# Altium PCB Greinke_Boost_Converter_Electromagnet.PcbDoc
Units mm, origin at the board's own origin, x right, y up, seen from the top; angles counter-clockwise.
Board outline 82.04 x 80.9 mm, 2 copper layers (Top Layer, Bottom Layer); 19 components, 29 nets, 62 pads, 8 vias.
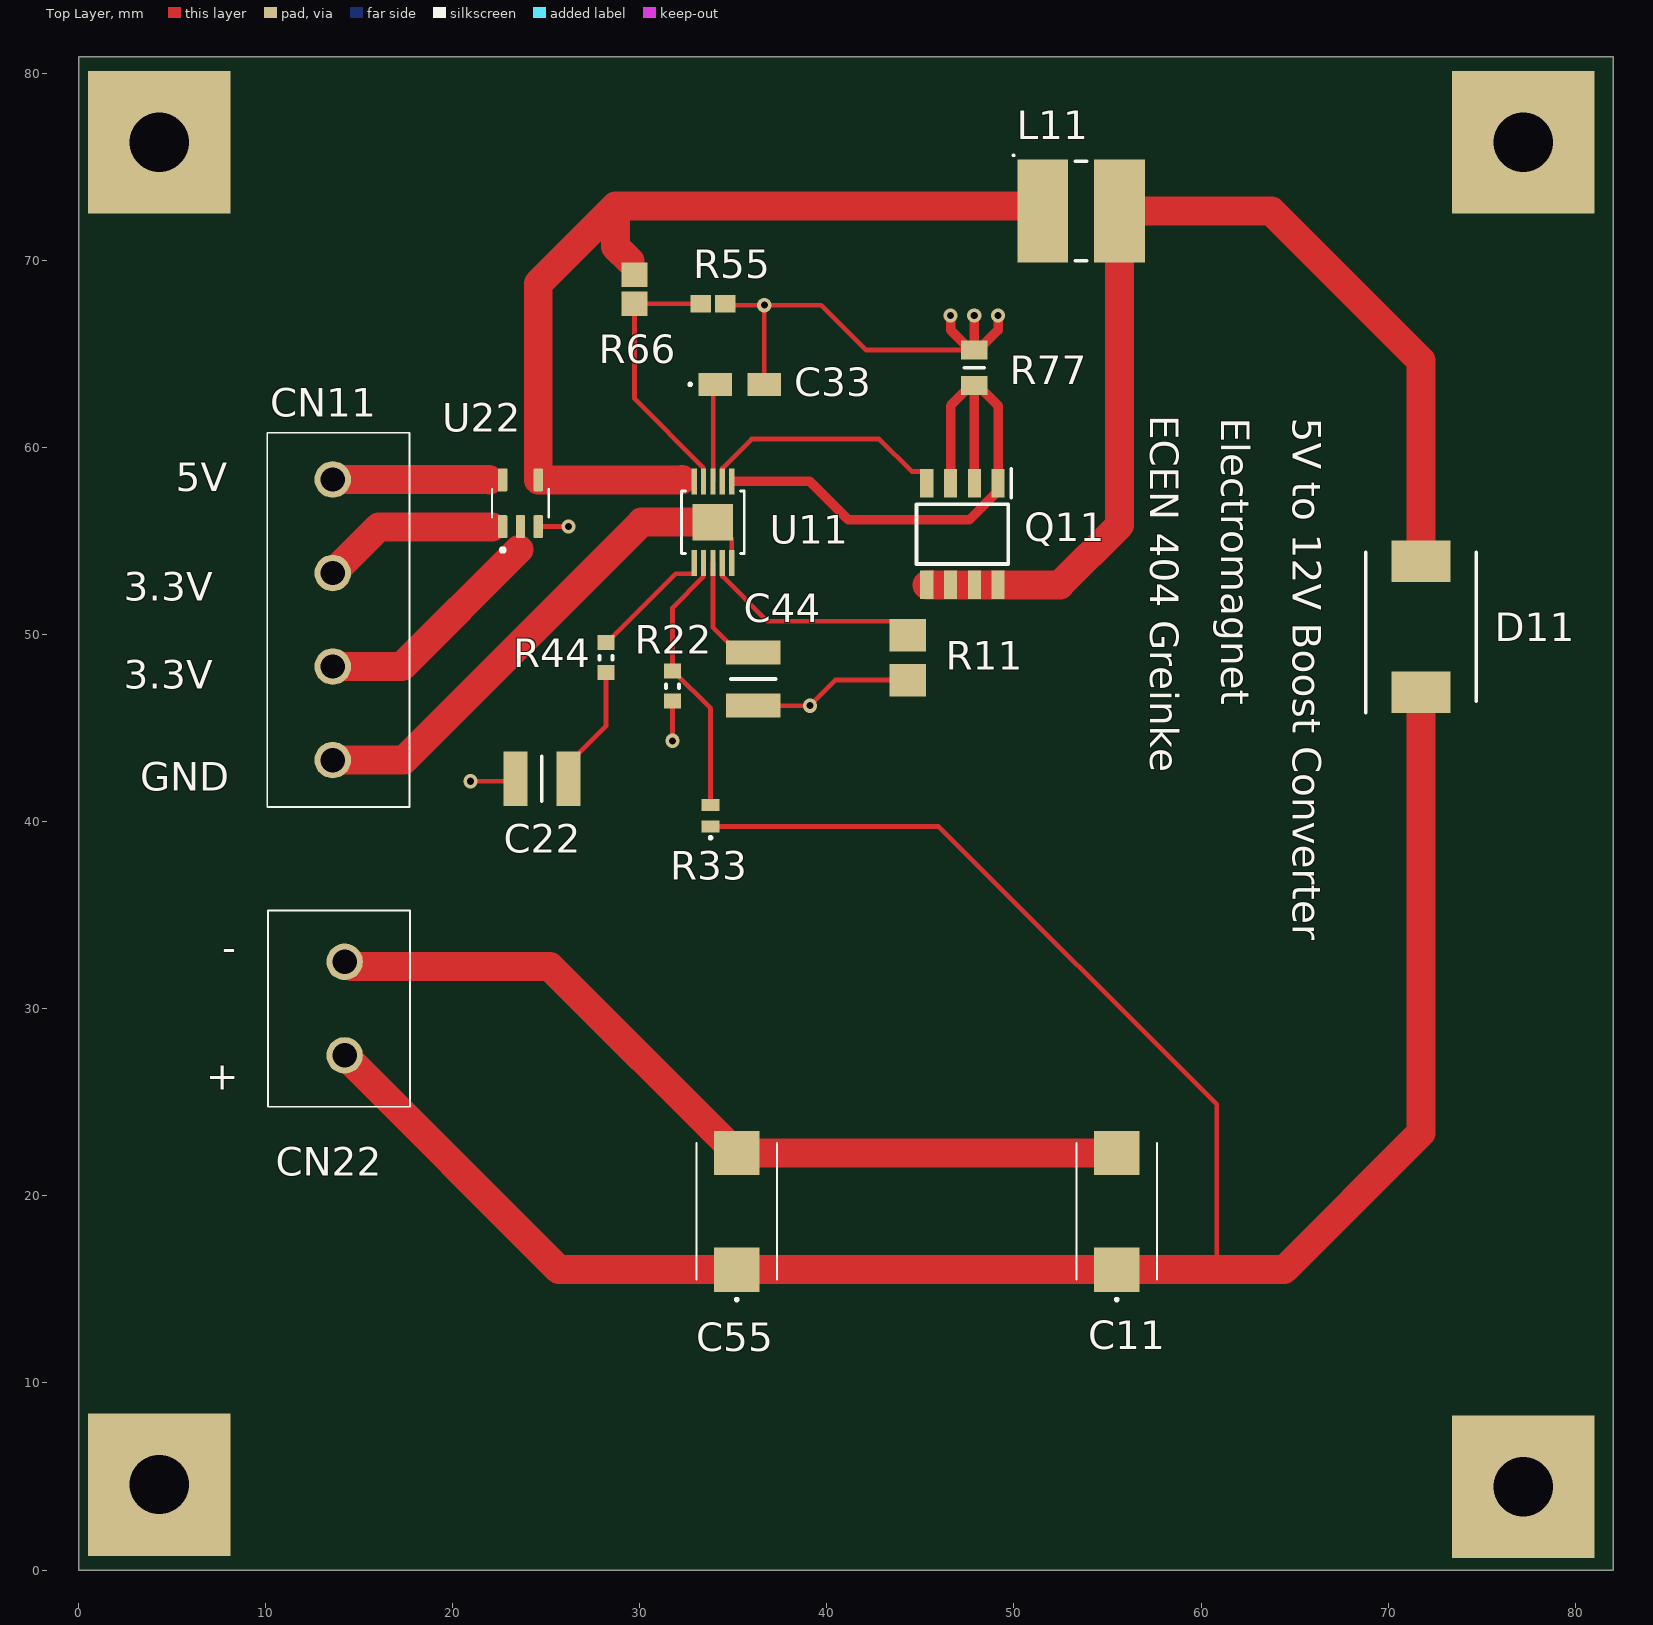
[diagram p0: Top Layer view]
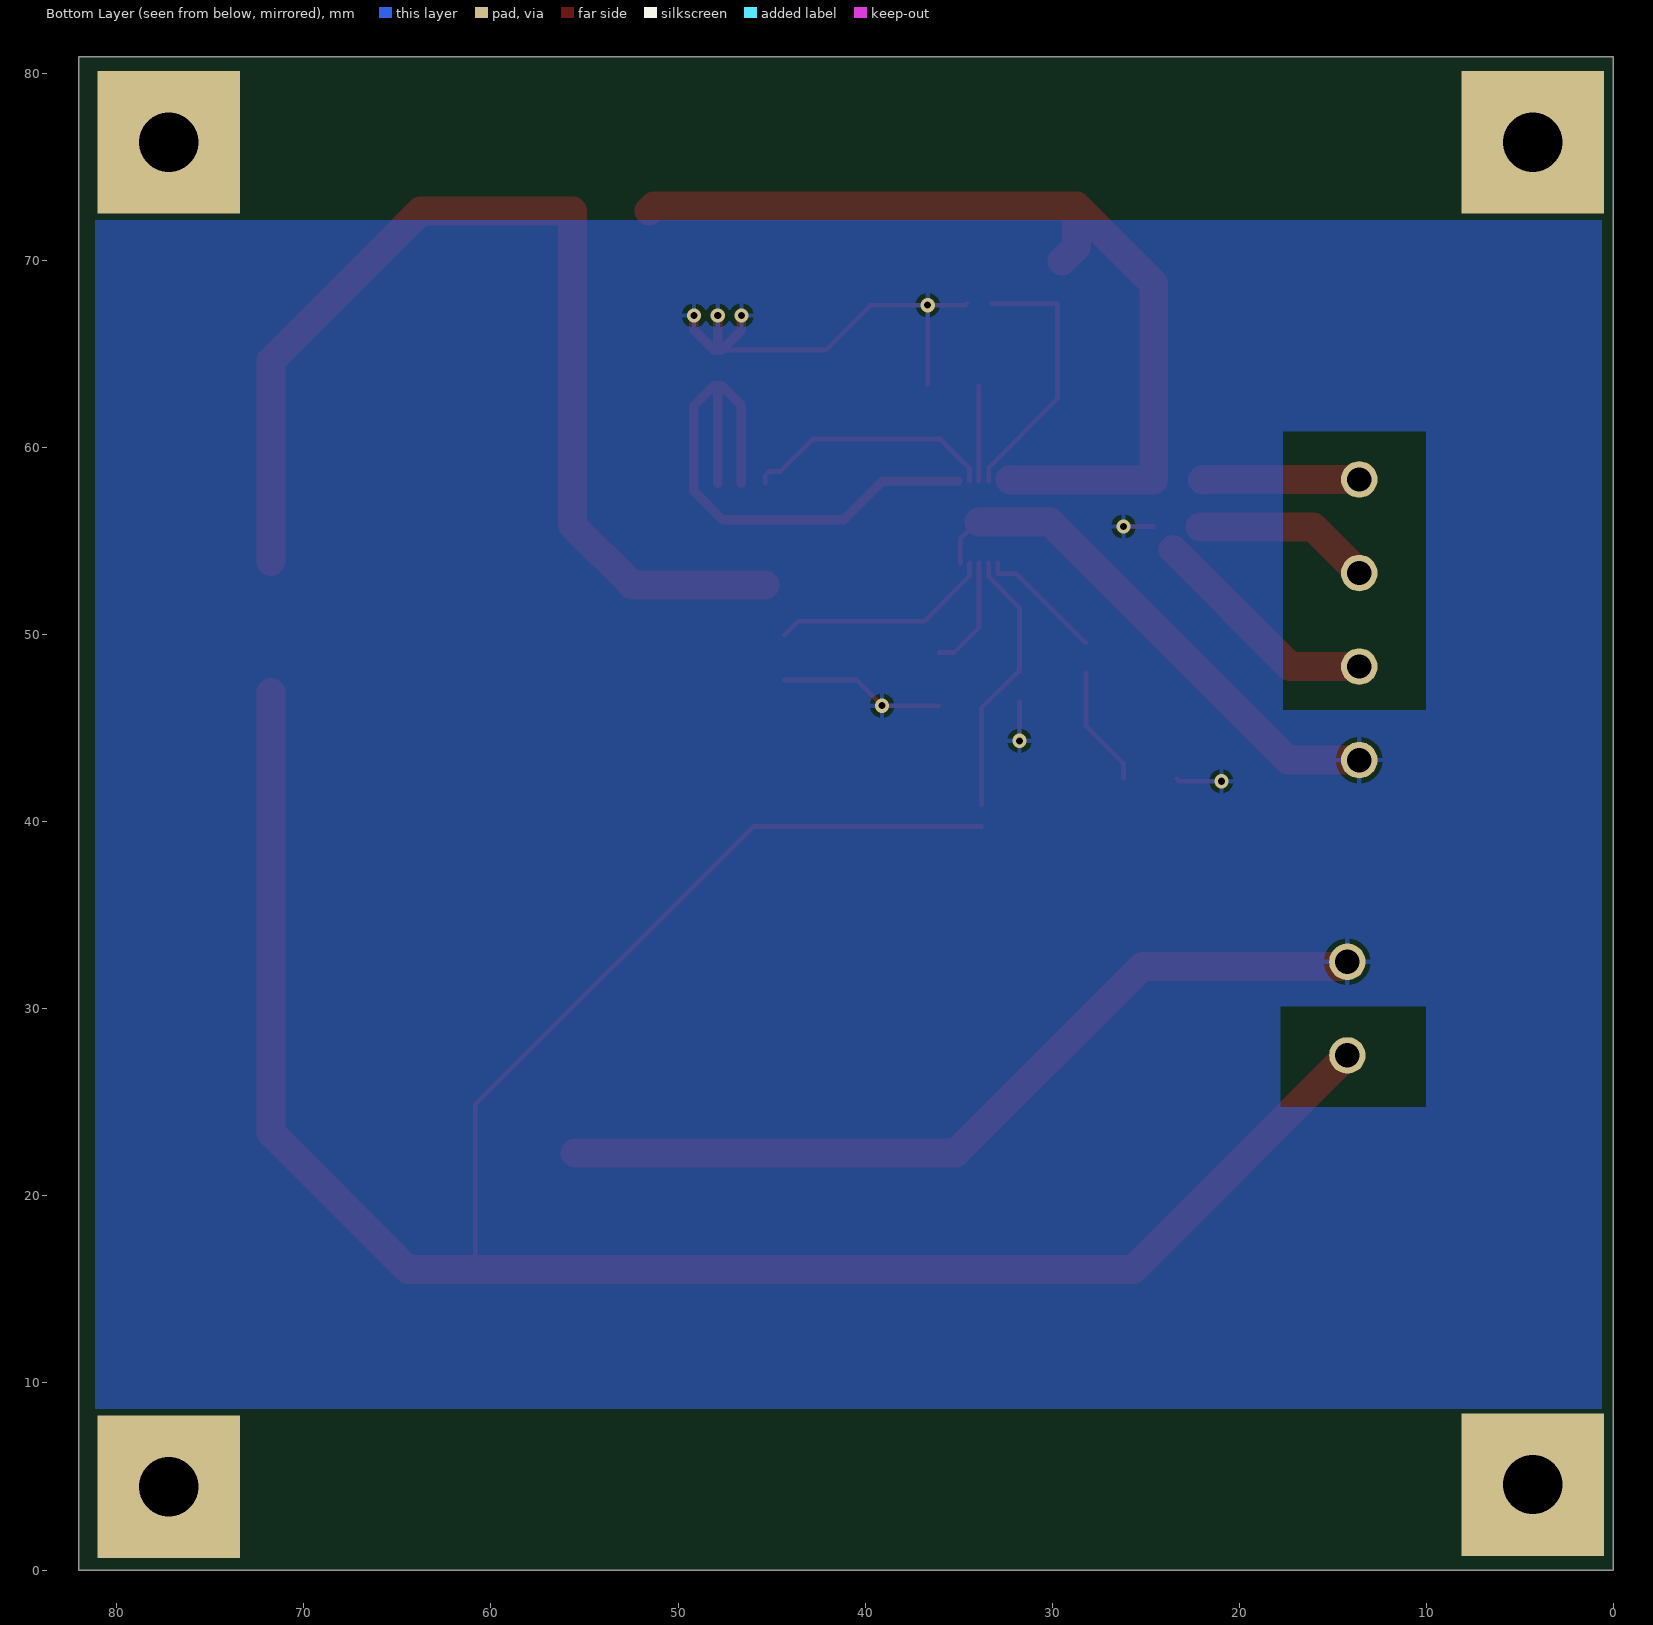
[diagram p1: Bottom Layer view, seen from below]

## Layer stack, top to bottom
Top Solder: solder mask 0.0102, Solder Resist, Dk 3.5
Top Layer: signal copper 0.0356
Dielectric 1: dielectric 0.32, FR-4, Dk 4.8
Bottom Layer: signal copper 0.0356
Bottom Solder: solder mask 0.0102, Solder Resist, Dk 3.5

## Board outline
0,0 82.042,0 82.042,80.899 0,80.899

## Design rules (kind name [scope] priority, off if disabled: settings)
Clearance [All] p1: gap=0.127 ignorepadtopadclearanceinfootprint=FALSE
PolygonConnect [All] p1: connectstyle=Relief reliefconductorwidth=0.254 reliefentries=4 polygonreliefangle="90 Angle" airgapwidth=0.254
RoutingVias [All] p1: holewidth=0.711 width=1.27 viastyle="Through Hole" minholewidth=0.711 minwidth=1.27 maxholewidth=0.711 maxwidth=1.27
SolderMaskExpansion [All] p1: expansion=0.102 istentingtop=FALSE
Width [All] p1: maxlimit=5.08 minlimit=0.127 preferedwidth=0.254
30 further rules are at their usual default settings.

## Components (designator, comment, footprint, x,y, rotation, side; value= is the part's Value field where it differs from the comment)
C11 "6.8uF" "6.8u Capacitor" 55.499,19.177 r90 top
C22 "6800pF" "6800p Capacitor" 24.638,42.291 r180 top
C33 "4.7uF" "4.7u Capacitor" 35.346,63.373 r0 top
C44 "0.01uF" "0.01u Capacitor" 36.068,47.752 r90 top
C55 "6.8uF" "6.8u Capacitor" 35.179,19.177 r90 top
CN11 "Connector" "4 Terminal Block" 13.589,58.293 r270 top
CN22 "Connector" "2 Terminal Blocks" 14.224,27.512 r90 top
D11 "Schottkey Diode" MBRS340 71.755,50.419 r90 top
L11 "4.7uH" 744774047 53.594,72.644 r0 top
Q11 "FDS8880" FDS8880 47.244,55.372 r270 top
R11 "24.3k" "24.3k Resistor" 44.323,48.768 r270 top
R22 "11k" "11k Resistor" 31.75,47.244 r270 top
R33 "71.5k" "71.5K RESISTOR" 33.782,40.319 r90 top
R44 "22k" "22k Resistor" 28.194,48.768 r270 top
R55 "10k" "10k Resistor" 33.909,67.691 r0 top
R66 "14.7k" "14.7k Resistor" 29.718,68.453 r270 top
R77 "25m" "25m Resistor" 47.879,64.262 r90 top
U11 "LT3757" LT3757 33.909,56.007 r90 top
U22 "74AHC1G08GV,125" 74AHC1G08GV,125 23.622,57.023 r90 top

## Footprints (in the part's own frame and the unit in brackets; to place one, negate y for a bottom-side part, rotate by r counter-clockwise, add the part's x,y. Pads: shape width x height; smd on the part's side, far side on the other; paste and mask are expansions set on the pad)
"0.01u Capacitor" [mm]
  rect 1.28x2.92 smd: 1(-1.547,0) 2(1.293,0)
  silkscreen extent -0.13,-1.2 -0.13,1.2
"2 Terminal Blocks" [mm]
  round 1.95 hole 1.3: 1(0,0) 2(5,0)
  silkscreen extent -2.75,-3.5 7.75,4.1
"4 Terminal Block" [mm]
  round 1.95 hole 1.3: 1(0,0) 2(5,0) 3(10,0) 4(15,0)
  silkscreen extent -2.5,-3.5 17.5,4.1
"4.7u Capacitor" [mm]
  rect 1.8x1.23 smd: 1(-1.31,0) 2(1.31,0)
  silkscreen extent -2.71,-0.05 -2.61,0.05
"6.8u Capacitor" [mm]
  rect 2.37x2.43 smd: 1(-3.12,0) 2(3.12,0)
  silkscreen extent -4.77,-2.15 3.65,2.15
"10k Resistor" [mm]
  rect 1.1x0.95 smd: 1(-0.65,0) 2(0.65,0)
"11k Resistor" [mm] "Chip Resistor, 2-Leads, Body 1.60x0.80mm, IPC Medium Density"
  rect 0.8x0.9 smd: 1(-0.8,0) 2(0.8,0)
  silkscreen extent -0.1,-0.35 0.1,0.35, body extent -0.85,-0.45 0.85,0.45, height 0.55
"14.7k Resistor" [mm] "Chip Resistor, 2-Leads, Body 2.00x1.25mm, IPC Medium Density"
  rect 1.3x1.4 smd: 1(-0.775,0) 2(0.775,0)
  body extent -1.07,-0.7 1.07,0.7, height 0.58
"22k Resistor" [mm] "Chip Resistor, 2-Leads, Body 1.60x0.80mm, IPC Medium Density"
  rect 0.8x0.9 smd: 1(-0.8,0) 2(0.8,0)
  silkscreen extent -0.1,-0.35 0.1,0.35, body extent -0.85,-0.45 0.85,0.45, height 0.55
"24.3k Resistor" [mm] "Chip Resistor, 2-Leads, Body 3.05x1.55mm, IPC Medium Density"
  rect 1.75x1.95 smd: 1(-1.2,0) 2(1.2,0)
  body extent -1.73,-0.95 1.73,0.95, height 0.58
"25m Resistor" [mm]
  rect 1x1.4 smd: 1(-0.95,0) 2(0.95,0)
  silkscreen extent 0,-0.53 0,0.53
"71.5K RESISTOR" [mm]
  rect 0.65x0.95 smd: 1(-0.575,0) 2(0.575,0)
  silkscreen extent -1.22,-0.05 -1.13,0.05
74AHC1G08GV,125 [mm]
  rrect25% 1.22x0.5 smd: 1(-1.245,0.95) 2(-1.245,0) 3(-1.245,-0.95) 4(1.245,-0.95) 5(1.245,0.95)
  silkscreen extent -2.6,-1.52 0.75,1.52, body extent -1.34,-1.5 1.41,1.5, height 1.1
"6800p Capacitor" [mm]
  rect 1.28x2.92 smd: 1(-1.547,0) 2(1.293,0)
  silkscreen extent -0.13,-1.2 -0.13,1.2
744774047 [mm] "Chip Inductor, 2-Leads, Body 5.80x5.20mm, IPC Medium Density"
  rect 2.71x5.52 smd: 1(-2.05,0) 2(2.05,0)
  silkscreen extent -3.67,-2.66 0.3,3.02, body extent -3.05,-2.75 3.05,2.75, height 4.85
FDS8880 [mm]
  rect 1.525x0.7 smd: 1(-2.712,1.905) 2(-2.712,0.635) 3(-2.712,-0.635) 4(-2.712,-1.905) 5(2.712,-1.905) 6(2.712,-0.635) 7(2.712,0.635) 8(2.712,1.905)
  silkscreen extent -3.47,-2.45 1.6,2.61
LT3757 [mil]
  rect 55x11 smd: 1(-86,39.4) 2(-86,19.7) 3(-86,0) 4(-86,-19.7) 5(-86,-39.4) 6(86,-39.4) 7(86,-19.7) 8(86,0) 9(86,19.7) 10(86,39.4)
  rect 76x85 smd paste-78.74: 11(0,0)
  silkscreen extent -66,-66 66,66, body extent -59,-96 59,96, height 20
MBRS340 [mm]
  rect 2.2x3.15 smd: 1(-3.5,0) 2(3.5,0)
  silkscreen extent -4.6,-2.95 3.97,2.95

## Part data
C11 C55: library part "6.8u Capacitor"
C22: library part "6800p Capacitor"
C33: library part "4.7u Capacitor"
C44: library part "0.01u Capacitor_1"
CN11: library part "4 Terminal Block"
CN22: library part "2 Terminal Blocks"
D11: library part MBRS340
L11: library part 744774047
R11: library part "24.3k Resistor"
R22: library part "11k Resistor"
R33: library part "71.5k Resistor"
R44: library part "22k Resistor"
R55: library part "10k Resistor"
R66: library part "14.7k Resistor"
R77: library part "25m Resistor"

## Free pads (board coordinates)
  rect 7.62x7.62 hole 3.175: MH(4.318,4.572) MH(4.318,76.327) MH(77.216,4.445) MH(77.216,76.327)

## Via types
v1: diameter 0.762, hole 0.381, Top Layer to Bottom Layer, 8 vias

## Nets (pads, with @x,y where several pads share a name; then routed paths per layer and width w, separated by ;. In a path a pad name is that pad's centre, name@x,y a point inside that pad or via, vN(x,y) a via of type N, cw(c..) or ccw(c..) an arc to the next point about the centre after c; other vN are vias at no path point)
NetC1_1: 
NetC1_2: 
NetC2_1: 
NetC3_1: 
NetC4_2: 
NetC11_1: C11.1 C55.1 CN22.1 D11.1 R33.1 | length 130.9
  Top Layer w0.254: R33.1 45.981,39.744 60.833,24.892 60.833,16.057
  Top Layer w1.549: CN22.1 25.679,16.057 C55.1 C11.1 60.833,16.057 64.444,16.057 71.755,23.368 D11.1
NetC11_2: C11.2 C22.2 C33.2 C44.1 C55.2 CN11.4 CN22.2 R11.2 R22.2 R55.2 R77.2 U11.5 U11.11 U22.3 | length 114.9
  Top Layer w0.254: v1(20.955,42.164) 23.218,42.164 C22.2 ; U22.3 v1(26.187,55.778) ; v1(31.75,44.323) R22.2 ; U11.11 34.023,56.007 34.91,55.121 U11.5 ; R55.2 34.639,67.611 v1(36.656,67.611) ; C44.1 v1(39.093,46.205) 40.456,47.568 R11.2 ; C33.2 v1(36.656,67.611) ; 46.67,65.212 47.679,65.212 R77.2 42.103,65.212 39.704,67.611 v1(36.656,67.611)
  Top Layer w0.508: v1(46.609,67.056) 46.609,66.282 R77.2@47.679,65.212 ; R77.2 v1(47.879,67.056) ; R77.2@48.079,65.212 49.149,66.282 v1(49.149,67.056)
  Top Layer w1.549: CN11.4 17.389,43.293 30.103,56.007 U11.11 ; CN22.2 14.332,32.512 14.586,32.258 25.188,32.258 C55.2@35.149,22.297 ; C55.2 C11.2
NetC22_1: C22.1 R44.2 | length 6.5
  Top Layer w0.254: C22.1 26.185,43.111 28.194,45.12 R44.2
NetC33_1: C33.1 U11.8 | length 5.1
  Top Layer w0.254: U11.8@33.922,58.207 33.922,58.863 33.925,58.866 C33.1@33.925,63.317
NetC44_2: C44.2 U11.3 | length 6.2
  Top Layer w0.254: U11.3 33.909,50.384 35.248,49.045 C44.2
NetCN1_1: 
NetCN11_1: CN11.1 U22.5 | length 9.1
  Top Layer w0.254: 21.971,58.268 U22.5
  Top Layer w1.549: CN11.1 21.946,58.293 21.971,58.268
NetCN11_2: CN11.2 U22.1 | length 9.5
  Top Layer w1.549: CN11.2 16.049,55.753 22.098,55.753
NetCN11_3: CN11.3 U22.2 | length 12.6
  Top Layer w1.549: CN11.3 17.286,48.293 23.549,54.556
NetD1_2: 
NetD11_2: D11.2 L11.2 Q11.5 Q11.6 Q11.7 Q11.8 | length 58.6
  Top Layer w1.549: Q11.5 Q11.6 Q11.7 Q11.8 52.451,52.66 55.644,55.853 L11.2 63.754,72.644 71.755,64.643 D11.2
NetL11_1: L11.1 R66.1 U11.10 U22.4 | length 50.2
  Top Layer w1.549: 29.464,69.977 28.702,70.739 28.702,72.898 ; 32.258,58.293 32.233,58.268 U22.4 24.572,68.768 28.702,72.898 ; L11.1 51.29,72.898 28.702,72.898
NetQ1_1: 
NetQ1_4: 
NetQ11_1: Q11.1 Q11.2 Q11.3 R77.1 U11.6 | length 33
  Top Layer w0.508: U11.6@35.044,58.191 39.091,58.191 41.148,56.134 47.611,56.134 49.149,57.672 Q11.1 49.149,62.242 48.079,63.312 R77.1 ; Q11.3 46.609,62.242 47.679,63.312 R77.1 ; Q11.2 R77.1
NetQ11_4: Q11.4 U11.7 | length 13.5
  Top Layer w0.254: U11.7 34.422,58.204 34.422,58.901 35.973,60.452 42.799,60.452 44.531,58.72 45.116,58.72 45.339,58.496 Q11.4
NetR1_1: 
NetR2_1: 
NetR4_1: 
NetR5_1: 
NetR11_1: R11.1 U11.4 | length 11.9
  Top Layer w0.254: U11.4 34.422,53.81 34.422,53.113 36.819,50.716 43.575,50.716 R11.1
NetR22_1: R22.1 R33.2 U11.2 | length 14.5
  Top Layer w0.254: U11.2 33.396,53.81 33.396,53.081 31.75,51.435 R22.1 31.8,48.044 33.782,46.062 R33.2
NetR44_1: R44.1 U11.1 | length 6.8
  Top Layer w0.254: R44.1 28.244,49.568 31.927,53.251 32.896,53.251 32.908,53.264 U11.1
NetR55_1: R55.1 R66.2 U11.9 | length 14.6
  Top Layer w0.254: R55.1 29.731,67.691 R66.2 29.718,62.609 33.396,58.931 33.396,58.204 U11.9

## Polygon pours and split planes (outlines as drawn)
NetC11_2 on Bottom Layer "GND" (solid, pour order 0): 0.635,8.636 0.635,72.136 81.153,72.136 81.153,8.636

## Other copper
Bottom Layer:
  pour cut-out: 10.033,24.765 17.78,24.765 17.78,30.099 10.033,30.099
  pour cut-out: 10.033,60.833 17.653,60.833 17.653,45.974 10.16,45.974 10.033,45.974

## Silkscreen, mask and mechanical layers (free items; w line width, h text height)
Top Overlay:
  text "ECEN 404 Greinke" at 57.277,61.722 h1.52 r270
  text "Electromagnet" at 61.087,61.595 h1.52 r270
  text "5V to 12V Boost Converter" at 64.897,61.595 h1.52 r270
  text "5V" at 5.207,57.658 h1.52
  text "3.3V" at 2.413,51.816 h1.52
  text "3.3V" at 2.413,47.117 h1.52
  text "GND" at 3.302,41.656 h1.52
  text "-" at 8.424,33.676 h1.52 r180
  text "+" at 8.551,26.945 h1.52 r180
Board Outline:
  the board outline again, w0.254